# Altium PCB PCB1.PcbDoc (part 5 of 12)
Units mm, origin at the board's own origin, x right, y up, seen from the top; angles counter-clockwise.
Board outline 122.17 x 121.67 mm, 2 copper layers (Top Layer, Bottom Layer); 274 components, 225 nets, 941 pads, 421 vias.
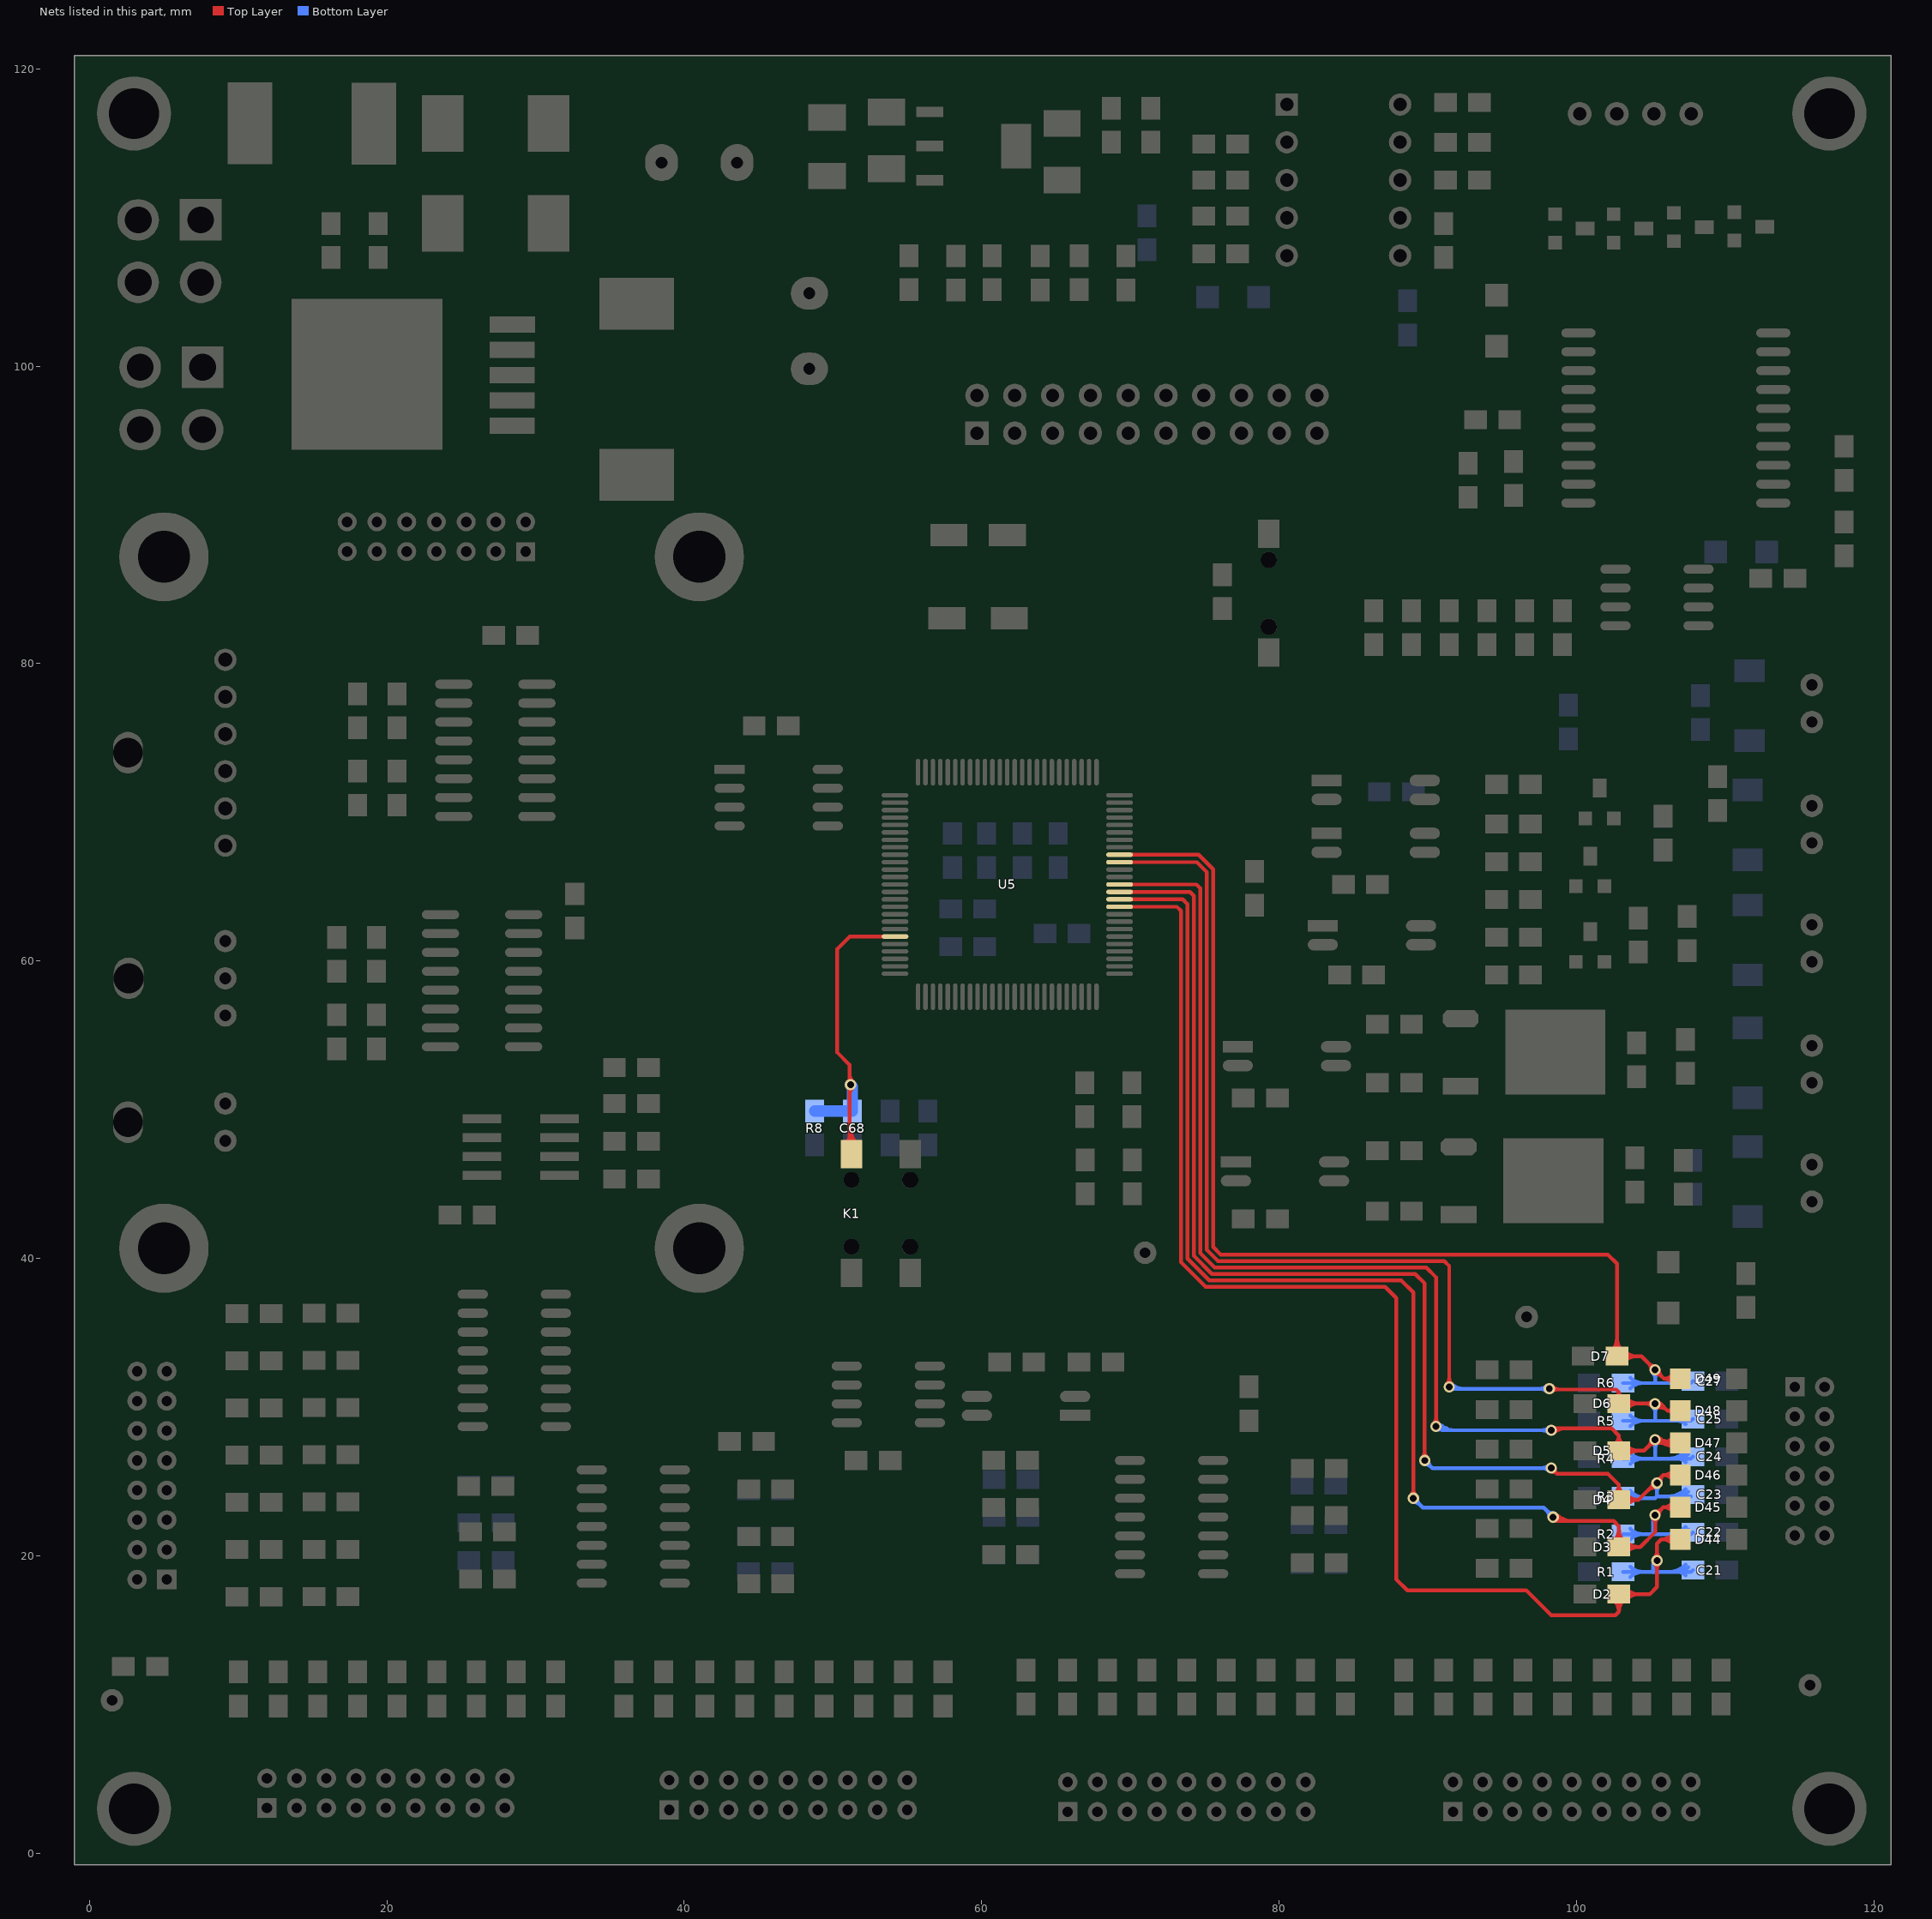
[diagram p5: the nets of this part, all layers, seen from the top]

## Via types
v1: diameter 0.762, hole 0.457, Top Layer to Bottom Layer, 339 vias
v2: diameter 1.27, hole 0.457, Top Layer to Bottom Layer, 39 vias
v3: diameter 0.889, hole 0.457, Top Layer to Bottom Layer, 21 vias
v4: diameter 1.27, hole 0.711, Top Layer to Bottom Layer, 12 vias
v5: diameter 1.524, hole 0.711, Top Layer to Bottom Layer, 5 vias
v6: diameter 1.016, hole 0.457, Top Layer to Bottom Layer, 3 vias
v7: diameter 0.711, hole 0.457, Top Layer to Bottom Layer, 1 vias
v8: diameter 1.524, hole 0.457, Top Layer to Bottom Layer, 1 vias

## Nets (pads, with @x,y where several pads share a name; then routed paths per layer and width w, separated by ;. In a path a pad name is that pad's centre, name@x,y a point inside that pad or via, vN(x,y) a via of type N, cw(c..) or ccw(c..) an arc to the next point about the centre after c; other vN are vias at no path point) (continued)
IN1: C21.2 D2.2 D44.A R1.2 U5.85 | length 150.8
  Top Layer w0.254: U5.85@69.272,63.651 73.128,63.651 73.406,63.373 73.406,39.751 75.057,38.1 87.122,38.1 87.884,37.338 87.884,18.415 88.621,17.678 96.622,17.678 98.298,16.002 102.616,16.002 102.846,16.232 ; D44.A@106.974,21.117 105.699,21.117 ; D2.2@102.495,17.055 cw(c101.707,16.232) 102.846,16.232 ; D2.2@102.495,17.055 cw(c101.707,16.232) 102.846,16.232 ; D2.2@102.495,17.055 cw(c101.707,16.232) 102.846,16.232 ; D2.2@102.495,17.055 cw(c101.707,16.232) 102.846,16.232 ; 102.846,16.232 cw(c103.986,16.232) D2.2@103.198,17.055 ; 102.846,16.232 cw(c103.986,16.232) D2.2@103.198,17.055 ; 102.846,16.232 cw(c103.986,16.232) D2.2@103.198,17.055 ; 102.846,16.232 cw(c103.986,16.232) D2.2@103.198,17.055 ; 102.846,16.232 D2.2@102.846,17.422 104.925,17.422 105.41,17.907 v1(105.41,19.685) 105.41,20.828 105.699,21.117 ; D2.2@103.333,17.063 cw(c104.2,16.196) 104.2,17.422 ; D2.2@103.333,17.063 cw(c104.2,16.196) 104.2,17.422 ; D2.2@103.333,17.063 cw(c104.2,16.196) 104.2,17.422 ; D2.2@103.333,17.063 cw(c104.2,16.196) 104.2,17.422 ; D2.2@103.333,17.781 ccw(c104.2,18.649) 104.2,17.422 ; D2.2@103.333,17.781 ccw(c104.2,18.649) 104.2,17.422 ; D2.2@103.333,17.781 ccw(c104.2,18.649) 104.2,17.422 ; D2.2@103.333,17.781 ccw(c104.2,18.649) 104.2,17.422 ; v1@105.23,19.505 cw(c104.797,19.072) 105.41,19.072 ; v1@105.23,19.505 cw(c104.797,19.072) 105.41,19.072 ; v1@105.23,19.505 cw(c104.797,19.072) 105.41,19.072 ; v1@105.23,19.505 cw(c104.797,19.072) 105.41,19.072 ; v1@105.23,19.865 ccw(c104.797,20.298) 105.41,20.298 ; v1@105.23,19.865 ccw(c104.797,20.298) 105.41,20.298 ; v1@105.23,19.865 ccw(c104.797,20.298) 105.41,20.298 ; v1@105.23,19.865 ccw(c104.797,20.298) 105.41,20.298 ; 105.41,19.072 cw(c106.023,19.072) v1@105.59,19.505 ; 105.41,19.072 cw(c106.023,19.072) v1@105.59,19.505 ; 105.41,19.072 cw(c106.023,19.072) v1@105.59,19.505 ; 105.41,19.072 cw(c106.023,19.072) v1@105.59,19.505 ; 105.41,20.298 ccw(c106.023,20.298) v1@105.59,19.865 ; 105.41,20.298 ccw(c106.023,20.298) v1@105.59,19.865 ; 105.41,20.298 ccw(c106.023,20.298) v1@105.59,19.865 ; 105.41,20.298 ccw(c106.023,20.298) v1@105.59,19.865 ; 105.699,21.117 cw(c105.699,19.984) D44.A@106.546,20.737 ; 105.699,21.117 ccw(c105.699,22.25) D44.A@106.546,21.498 ; 105.699,21.117 cw(c105.699,19.984) D44.A@106.546,20.737 ; 105.699,21.117 ccw(c105.699,22.25) D44.A@106.546,21.498 ; 105.699,21.117 cw(c105.699,19.984) D44.A@106.546,20.737 ; 105.699,21.117 ccw(c105.699,22.25) D44.A@106.546,21.498 ; 105.699,21.117 cw(c105.699,19.984) D44.A@106.546,20.737 ; 105.699,21.117 ccw(c105.699,22.25) D44.A@106.546,21.498 ; 106.264,21.117 cw(c106.264,20.486) D44.A@106.736,20.905 ; 106.264,21.117 ccw(c106.264,21.748) D44.A@106.736,21.329 ; 106.264,21.117 cw(c106.264,20.486) D44.A@106.736,20.905 ; 106.264,21.117 ccw(c106.264,21.748) D44.A@106.736,21.329 ; 106.264,21.117 cw(c106.264,20.486) D44.A@106.736,20.905 ; 106.264,21.117 ccw(c106.264,21.748) D44.A@106.736,21.329 ; 106.264,21.117 cw(c106.264,20.486) D44.A@106.736,20.905 ; 106.264,21.117 ccw(c106.264,21.748) D44.A@106.736,21.329
  Bottom Layer w0.254: R1.2@103.124,18.923 105.156,18.923 ; C21.2@107.823,19.05 107.696,18.923 105.156,18.923 ; R1.2@103.61,18.564 cw(c104.477,17.697) 104.477,18.923 ; R1.2@103.61,18.564 cw(c104.477,17.697) 104.477,18.923 ; R1.2@103.61,18.564 cw(c104.477,17.697) 104.477,18.923 ; R1.2@103.61,18.564 cw(c104.477,17.697) 104.477,18.923 ; R1.2@103.61,19.282 ccw(c104.477,20.149) 104.477,18.923 ; R1.2@103.61,19.282 ccw(c104.477,20.149) 104.477,18.923 ; R1.2@103.61,19.282 ccw(c104.477,20.149) 104.477,18.923 ; R1.2@103.61,19.282 ccw(c104.477,20.149) 104.477,18.923 ; 105.156,18.882 cw(c105.791,18.882) v1@105.519,19.456 ; 105.156,18.882 cw(c105.791,18.882) v1@105.519,19.456 ; 105.156,18.882 cw(c105.791,18.882) v1@105.519,19.456 ; 105.156,18.882 cw(c105.791,18.882) v1@105.519,19.456 ; 105.156,18.923 105.156,19.431 v1(105.41,19.685) ; 105.156,19.283 cw(c105.6,19.283) v1(105.41,19.685) ; 105.156,19.283 cw(c105.6,19.283) v1(105.41,19.685) ; 105.156,19.283 cw(c105.6,19.283) v1(105.41,19.685) ; 105.156,19.283 cw(c105.6,19.283) v1(105.41,19.685) ; 106.163,18.923 ccw(c106.163,20.583) C21.2@107.337,19.409 ; 106.163,18.923 ccw(c106.163,20.583) C21.2@107.337,19.409 ; 106.163,18.923 ccw(c106.163,20.583) C21.2@107.337,19.409 ; 106.163,18.923 ccw(c106.163,20.583) C21.2@107.337,19.409 ; 106.776,18.923 cw(c106.776,18.13) C21.2@107.337,18.691 ; 106.776,18.923 ccw(c106.776,19.97) C21.2@107.516,19.23 ; 106.776,18.923 cw(c106.776,18.13) C21.2@107.337,18.691 ; 106.776,18.923 ccw(c106.776,19.97) C21.2@107.516,19.23 ; 106.776,18.923 cw(c106.776,18.13) C21.2@107.337,18.691 ; 106.776,18.923 ccw(c106.776,19.97) C21.2@107.516,19.23 ; 106.776,18.923 cw(c106.776,18.13) C21.2@107.337,18.691 ; 106.776,18.923 ccw(c106.776,19.97) C21.2@107.516,19.23
IN2: C22.2 D3.2 D45.A R2.2 U5.86 | length 172.4
  Top Layer w0.254: U5.86@69.272,64.151 73.517,64.151 73.838,63.83 73.838,40.003 75.309,38.532 88.214,38.532 89.027,37.719 v1(89.027,23.876) ; D45.A@106.974,23.276 105.826,23.276 ; v1@88.847,24.056 ccw(c88.414,24.489) 89.027,24.489 ; v1@88.847,24.056 ccw(c88.414,24.489) 89.027,24.489 ; v1@88.847,24.056 ccw(c88.414,24.489) 89.027,24.489 ; v1@88.847,24.056 ccw(c88.414,24.489) 89.027,24.489 ; 89.027,24.489 ccw(c89.64,24.489) v1@89.207,24.056 ; 89.027,24.489 ccw(c89.64,24.489) v1@89.207,24.056 ; 89.027,24.489 ccw(c89.64,24.489) v1@89.207,24.056 ; 89.027,24.489 ccw(c89.64,24.489) v1@89.207,24.056 ; v1(98.425,22.606) ccw(c99.038,23.219) 99.038,22.352 ; v1(98.425,22.606) cw(c98.663,22.34) 98.841,22.649 ; v1(98.425,22.606) cw(c98.663,22.34) 98.841,22.649 ; v1(98.425,22.606) cw(c98.663,22.34) 98.841,22.649 ; v1(98.425,22.606) ccw(c99.038,23.219) 99.038,22.352 ; v1(98.425,22.606) cw(c98.663,22.34) 98.841,22.649 ; v1(98.425,22.606) cw(c98.663,22.34) 98.841,22.649 ; v1(98.425,22.606) ccw(c99.038,23.219) 99.038,22.352 ; v1(98.425,22.606) cw(c98.663,22.34) 98.841,22.649 ; v1(98.425,22.606) ccw(c99.038,23.219) 99.038,22.352 ; v1(98.425,22.606) 98.679,22.352 102.489,22.352 102.846,21.995 D3.2@102.846,20.597 104.29,20.597 105.283,21.59 v1(105.283,22.733) ; v1@98.548,22.384 cw(c98.679,22.148) 98.814,22.382 ; v1@98.548,22.384 cw(c98.679,22.148) 98.814,22.382 ; v1@98.548,22.384 cw(c98.679,22.148) 98.814,22.382 ; v1@98.548,22.384 cw(c98.679,22.148) 98.814,22.382 ; v1@98.548,22.384 cw(c98.679,22.148) 98.814,22.382 ; v1@98.548,22.384 cw(c98.679,22.148) 98.814,22.382 ; v1@98.594,22.417 cw(c98.909,22.064) 99.146,22.473 ; v1@98.594,22.417 cw(c98.909,22.064) 99.146,22.473 ; v1@98.594,22.417 cw(c98.909,22.064) 99.146,22.473 ; v1@98.594,22.417 cw(c98.909,22.064) 99.146,22.473 ; v1@98.594,22.417 cw(c98.909,22.064) 99.146,22.473 ; v1@98.594,22.417 cw(c98.909,22.064) 99.146,22.473 ; v1@98.605,22.786 ccw(c99.651,23.832) 99.651,22.352 ; v1@98.605,22.786 ccw(c99.651,23.832) 99.651,22.352 ; v1@98.605,22.786 ccw(c99.651,23.832) 99.651,22.352 ; v1@98.605,22.786 ccw(c99.651,23.832) 99.651,22.352 ; v1@98.679,22.61 ccw(c98.949,22.615) 98.814,22.382 ; v1@98.679,22.61 ccw(c98.949,22.615) 98.814,22.382 ; v1@98.679,22.61 ccw(c98.949,22.615) 98.814,22.382 ; v1@98.679,22.61 ccw(c98.949,22.615) 98.814,22.382 ; v1@98.679,22.61 ccw(c98.949,22.615) 98.814,22.382 ; v1@98.679,22.61 ccw(c98.949,22.615) 98.814,22.382 ; D3.2@102.487,20.956 ccw(c101.62,21.824) 102.846,21.824 ; D3.2@102.487,20.956 ccw(c101.62,21.824) 102.846,21.824 ; D3.2@102.487,20.956 ccw(c101.62,21.824) 102.846,21.824 ; D3.2@102.487,20.956 ccw(c101.62,21.824) 102.846,21.824 ; 102.846,21.824 ccw(c104.073,21.824) D3.2@103.206,20.956 ; 102.846,21.824 ccw(c104.073,21.824) D3.2@103.206,20.956 ; 102.846,21.824 ccw(c104.073,21.824) D3.2@103.206,20.956 ; 102.846,21.824 ccw(c104.073,21.824) D3.2@103.206,20.956 ; D3.2@103.333,20.238 cw(c104.2,19.371) 104.2,20.597 ; D3.2@103.333,20.238 cw(c104.2,19.371) 104.2,20.597 ; D3.2@103.333,20.238 cw(c104.2,19.371) 104.2,20.597 ; D3.2@103.333,20.238 cw(c104.2,19.371) 104.2,20.597 ; D3.2@103.333,20.956 ccw(c104.2,21.824) 104.2,20.597 ; D3.2@103.333,20.956 ccw(c104.2,21.824) 104.2,20.597 ; D3.2@103.333,20.956 ccw(c104.2,21.824) 104.2,20.597 ; D3.2@103.333,20.956 ccw(c104.2,21.824) 104.2,20.597 ; v1@105.103,22.553 cw(c104.67,22.12) 105.283,22.12 ; v1@105.103,22.553 cw(c104.67,22.12) 105.283,22.12 ; v1@105.103,22.553 cw(c104.67,22.12) 105.283,22.12 ; v1@105.103,22.553 cw(c104.67,22.12) 105.283,22.12 ; 105.283,22.12 cw(c105.896,22.12) v1@105.463,22.553 ; 105.283,22.12 cw(c105.896,22.12) v1@105.463,22.553 ; 105.283,22.12 cw(c105.896,22.12) v1@105.463,22.553 ; 105.283,22.12 cw(c105.896,22.12) v1@105.463,22.553 ; v1(105.283,22.733) ccw(c105.194,23.168) 105.623,23.053 ; v1(105.283,22.733) ccw(c105.194,23.168) 105.623,23.053 ; v1(105.283,22.733) ccw(c105.194,23.168) 105.623,23.053 ; v1(105.283,22.733) cw(c105.718,22.644) 105.603,23.073 ; v1(105.283,22.733) cw(c105.718,22.644) 105.603,23.073 ; v1(105.283,22.733) cw(c105.718,22.644) 105.603,23.073 ; v1(105.283,22.733) ccw(c105.194,23.168) 105.623,23.053 ; v1(105.283,22.733) ccw(c105.194,23.168) 105.623,23.053 ; v1(105.283,22.733) cw(c105.718,22.644) 105.603,23.073 ; v1(105.283,22.733) cw(c105.718,22.644) 105.603,23.073 ; v1(105.283,22.733) ccw(c105.194,23.168) 105.623,23.053 ; v1(105.283,22.733) cw(c105.718,22.644) 105.603,23.073 ; v1(105.283,22.733) 105.826,23.276 ; v1@105.283,22.987 ccw(c105.283,23.6) 105.717,23.167 ; v1@105.283,22.987 ccw(c105.283,23.6) 105.717,23.167 ; v1@105.283,22.987 ccw(c105.283,23.6) 105.717,23.167 ; v1@105.283,22.987 ccw(c105.283,23.6) 105.717,23.167 ; v1@105.537,22.733 cw(c106.15,22.733) 105.717,23.167 ; v1@105.537,22.733 cw(c106.15,22.733) 105.717,23.167 ; v1@105.537,22.733 cw(c106.15,22.733) 105.717,23.167 ; v1@105.537,22.733 cw(c106.15,22.733) 105.717,23.167 ; 105.826,23.276 cw(c105.826,22.412) D45.A@106.517,22.932 ; 105.826,23.276 ccw(c105.826,24.14) D45.A@106.517,23.621 ; 105.826,23.276 cw(c105.826,22.412) D45.A@106.517,22.932 ; 105.826,23.276 ccw(c105.826,24.14) D45.A@106.517,23.621 ; 105.826,23.276 cw(c105.826,22.412) D45.A@106.517,22.932 ; 105.826,23.276 ccw(c105.826,24.14) D45.A@106.517,23.621 ; 105.826,23.276 cw(c105.826,22.412) D45.A@106.517,22.932 ; 105.826,23.276 ccw(c105.826,24.14) D45.A@106.517,23.621
  Bottom Layer w0.254: v1(89.027,23.876) 89.662,23.241 97.79,23.241 v1(98.425,22.606) ; R2.2@103.124,21.463 105.156,21.463 ; v1(105.283,22.733) 105.156,22.606 105.156,21.463 ; C22.2@107.823,21.59 107.696,21.463 105.156,21.463 ; v1@89.027,23.622 cw(c89.027,23.009) 89.461,23.442 ; v1@89.027,23.622 cw(c89.027,23.009) 89.461,23.442 ; v1@89.027,23.622 cw(c89.027,23.009) 89.461,23.442 ; v1@89.027,23.622 cw(c89.027,23.009) 89.461,23.442 ; v1@89.281,23.876 ccw(c89.894,23.876) 89.461,23.442 ; v1@89.281,23.876 ccw(c89.894,23.876) 89.461,23.442 ; v1@89.281,23.876 ccw(c89.894,23.876) 89.461,23.442 ; v1@89.281,23.876 ccw(c89.894,23.876) 89.461,23.442 ; 97.991,23.04 cw(c97.558,22.606) v1@98.171,22.606 ; 97.991,23.04 ccw(c98.425,23.473) v1@98.425,22.86 ; 97.991,23.04 cw(c97.558,22.606) v1@98.171,22.606 ; 97.991,23.04 ccw(c98.425,23.473) v1@98.425,22.86 ; 97.991,23.04 cw(c97.558,22.606) v1@98.171,22.606 ; 97.991,23.04 ccw(c98.425,23.473) v1@98.425,22.86 ; 97.991,23.04 cw(c97.558,22.606) v1@98.171,22.606 ; 97.991,23.04 ccw(c98.425,23.473) v1@98.425,22.86 ; R2.2@103.61,21.104 cw(c104.477,20.237) 104.477,21.463 ; R2.2@103.61,21.104 cw(c104.477,20.237) 104.477,21.463 ; R2.2@103.61,21.104 cw(c104.477,20.237) 104.477,21.463 ; R2.2@103.61,21.104 cw(c104.477,20.237) 104.477,21.463 ; R2.2@103.61,21.822 ccw(c104.477,22.689) 104.477,21.463 ; R2.2@103.61,21.822 ccw(c104.477,22.689) 104.477,21.463 ; R2.2@103.61,21.822 ccw(c104.477,22.689) 104.477,21.463 ; R2.2@103.61,21.822 ccw(c104.477,22.689) 104.477,21.463 ; 105.156,21.813 cw(c106.203,21.813) v1@105.463,22.553 ; 105.156,21.813 cw(c106.203,21.813) v1@105.463,22.553 ; 105.156,21.813 cw(c106.203,21.813) v1@105.463,22.553 ; 105.156,21.813 cw(c106.203,21.813) v1@105.463,22.553 ; 106.163,21.463 ccw(c106.163,23.123) C22.2@107.337,21.949 ; 106.163,21.463 ccw(c106.163,23.123) C22.2@107.337,21.949 ; 106.163,21.463 ccw(c106.163,23.123) C22.2@107.337,21.949 ; 106.163,21.463 ccw(c106.163,23.123) C22.2@107.337,21.949 ; 106.776,21.463 cw(c106.776,20.67) C22.2@107.337,21.231 ; 106.776,21.463 ccw(c106.776,22.51) C22.2@107.516,21.77 ; 106.776,21.463 cw(c106.776,20.67) C22.2@107.337,21.231 ; 106.776,21.463 ccw(c106.776,22.51) C22.2@107.516,21.77 ; 106.776,21.463 cw(c106.776,20.67) C22.2@107.337,21.231 ; 106.776,21.463 ccw(c106.776,22.51) C22.2@107.516,21.77 ; 106.776,21.463 cw(c106.776,20.67) C22.2@107.337,21.231 ; 106.776,21.463 ccw(c106.776,22.51) C22.2@107.516,21.77
IN3: C23.2 D4.2 D46.A R3.2 U5.87 | length 153.3
  Top Layer w0.254: U5.87@69.272,64.651 74.008,64.651 74.27,64.389 74.27,40.182 75.488,38.964 89.154,38.964 89.789,38.329 v1(89.789,26.416) ; v1(98.298,25.908) 98.298,25.781 98.425,25.781 98.679,25.527 ; D46.A@106.974,25.435 105.826,25.435 ; v1@89.609,26.596 ccw(c89.176,27.029) 89.789,27.029 ; v1@89.609,26.596 ccw(c89.176,27.029) 89.789,27.029 ; v1@89.609,26.596 ccw(c89.176,27.029) 89.789,27.029 ; v1@89.609,26.596 ccw(c89.176,27.029) 89.789,27.029 ; 89.789,27.029 ccw(c90.402,27.029) v1@89.969,26.596 ; 89.789,27.029 ccw(c90.402,27.029) v1@89.969,26.596 ; 89.789,27.029 ccw(c90.402,27.029) v1@89.969,26.596 ; 89.789,27.029 ccw(c90.402,27.029) v1@89.969,26.596 ; v1@98.322,25.655 cw(c98.365,25.213) 98.679,25.527 ; v1@98.322,25.655 cw(c98.365,25.213) 98.679,25.527 ; v1@98.322,25.655 cw(c98.365,25.213) 98.679,25.527 ; v1@98.322,25.655 cw(c98.365,25.213) 98.679,25.527 ; v1@98.551,25.884 ccw(c98.993,25.841) 98.679,25.527 ; v1@98.551,25.884 ccw(c98.993,25.841) 98.679,25.527 ; v1@98.551,25.884 ccw(c98.993,25.841) 98.679,25.527 ; v1@98.551,25.884 ccw(c98.993,25.841) 98.679,25.527 ; 98.679,25.527 102.108,25.527 102.846,24.789 ; D4.2@102.541,24.179 ccw(c102.084,24.789) 102.846,24.789 ; D4.2@102.541,24.179 ccw(c102.084,24.789) 102.846,24.789 ; D4.2@102.541,24.179 ccw(c102.084,24.789) 102.846,24.789 ; D4.2@102.541,24.179 ccw(c102.084,24.789) 102.846,24.789 ; 102.846,24.789 ccw(c103.609,24.789) D4.2@103.151,24.179 ; 102.846,24.789 ccw(c103.609,24.789) D4.2@103.151,24.179 ; 102.846,24.789 ccw(c103.609,24.789) D4.2@103.151,24.179 ; 102.846,24.789 ccw(c103.609,24.789) D4.2@103.151,24.179 ; 102.846,24.789 D4.2@102.846,23.772 104.163,23.772 ; D4.2@103.34,23.421 cw(c104.163,22.633) 104.163,23.772 ; D4.2@103.34,23.421 cw(c104.163,22.633) 104.163,23.772 ; D4.2@103.34,23.421 cw(c104.163,22.633) 104.163,23.772 ; D4.2@103.34,23.421 cw(c104.163,22.633) 104.163,23.772 ; D4.2@103.34,24.124 ccw(c104.163,24.911) 104.163,23.772 ; D4.2@103.34,24.124 ccw(c104.163,24.911) 104.163,23.772 ; D4.2@103.34,24.124 ccw(c104.163,24.911) 104.163,23.772 ; D4.2@103.34,24.124 ccw(c104.163,24.911) 104.163,23.772 ; 104.163,23.772 105.826,25.435 ; 104.76,24.369 cw(c105.41,23.718) v1@105.41,24.638 ; 104.76,24.369 cw(c105.41,23.718) v1@105.41,24.638 ; 104.76,24.369 cw(c105.41,23.718) v1@105.41,24.638 ; 104.76,24.369 cw(c105.41,23.718) v1@105.41,24.638 ; 105.015,24.532 ccw(c104.864,25.095) v1(105.41,24.892) ; 105.015,24.532 ccw(c104.864,25.095) v1(105.41,24.892) ; 105.015,24.532 ccw(c104.864,25.095) v1(105.41,24.892) ; 105.015,24.532 ccw(c104.864,25.095) v1(105.41,24.892) ; 105.015,24.532 ccw(c104.864,25.095) v1(105.41,24.892) ; 105.015,24.532 ccw(c104.864,25.095) v1(105.41,24.892) ; 105.066,24.675 ccw(c104.849,24.892) v1@105.156,24.892 ; 105.066,24.675 ccw(c104.849,24.892) v1@105.156,24.892 ; 105.066,24.675 ccw(c104.849,24.892) v1@105.156,24.892 ; 105.066,24.675 ccw(c104.849,24.892) v1@105.156,24.892 ; v1@105.41,25.146 ccw(c105.41,25.453) 105.627,25.236 ; v1@105.41,25.146 ccw(c105.41,25.453) 105.627,25.236 ; v1@105.41,25.146 ccw(c105.41,25.453) 105.627,25.236 ; v1@105.41,25.146 ccw(c105.41,25.453) 105.627,25.236 ; v1@105.661,24.931 cw(c106.241,25.02) 105.826,25.435 ; v1@105.661,24.931 cw(c106.241,25.02) 105.826,25.435 ; v1@105.661,24.931 cw(c106.241,25.02) 105.826,25.435 ; v1@105.661,24.931 cw(c106.241,25.02) 105.826,25.435 ; 105.826,25.435 cw(c105.826,24.571) D46.A@106.517,25.091 ; 105.826,25.435 ccw(c105.826,26.299) D46.A@106.517,25.78 ; 105.826,25.435 cw(c105.826,24.571) D46.A@106.517,25.091 ; 105.826,25.435 ccw(c105.826,26.299) D46.A@106.517,25.78 ; 105.826,25.435 cw(c105.826,24.571) D46.A@106.517,25.091 ; 105.826,25.435 ccw(c105.826,26.299) D46.A@106.517,25.78 ; 105.826,25.435 cw(c105.826,24.571) D46.A@106.517,25.091 ; 105.826,25.435 ccw(c105.826,26.299) D46.A@106.517,25.78
  Bottom Layer w0.254: v1(89.789,26.416) 90.297,25.908 v1(98.298,25.908) ; R3.2@103.124,24.003 103.632,24.003 103.505,23.876 105.283,23.876 105.41,24.003 ; v1(105.41,24.892) 105.41,24.003 ; C23.2@107.696,24.003 105.41,24.003 ; v1@89.789,26.162 cw(c89.789,25.549) 90.223,25.982 ; v1@89.789,26.162 cw(c89.789,25.549) 90.223,25.982 ; v1@89.789,26.162 cw(c89.789,25.549) 90.223,25.982 ; v1@89.789,26.162 cw(c89.789,25.549) 90.223,25.982 ; v1@90.043,26.416 ccw(c90.656,26.416) 90.223,25.982 ; v1@90.043,26.416 ccw(c90.656,26.416) 90.223,25.982 ; v1@90.043,26.416 ccw(c90.656,26.416) 90.223,25.982 ; v1@90.043,26.416 ccw(c90.656,26.416) 90.223,25.982 ; 97.685,25.908 cw(c97.685,25.295) v1@98.118,25.728 ; 97.685,25.908 ccw(c97.685,26.521) v1@98.118,26.088 ; 97.685,25.908 cw(c97.685,25.295) v1@98.118,25.728 ; 97.685,25.908 ccw(c97.685,26.521) v1@98.118,26.088 ; 97.685,25.908 cw(c97.685,25.295) v1@98.118,25.728 ; 97.685,25.908 ccw(c97.685,26.521) v1@98.118,26.088 ; 97.685,25.908 cw(c97.685,25.295) v1@98.118,25.728 ; 97.685,25.908 ccw(c97.685,26.521) v1@98.118,26.088 ; R3.2@103.431,24.183 ccw(c104.171,24.923) 104.171,23.876 ; R3.2@103.431,24.183 ccw(c104.171,24.923) 104.171,23.876 ; R3.2@103.431,24.183 ccw(c104.171,24.923) 104.171,23.876 ; R3.2@103.431,24.183 ccw(c104.171,24.923) 104.171,23.876 ; R3.2@103.61,23.644 cw(c104.171,23.083) 104.171,23.876 ; R3.2@103.61,23.644 cw(c104.171,23.083) 104.171,23.876 ; R3.2@103.61,23.644 cw(c104.171,23.083) 104.171,23.876 ; R3.2@103.61,23.644 cw(c104.171,23.083) 104.171,23.876 ; R3.2@103.61,24.362 ccw(c104.784,25.536) 104.784,23.876 ; R3.2@103.61,24.362 ccw(c104.784,25.536) 104.784,23.876 ; R3.2@103.61,24.362 ccw(c104.784,25.536) 104.784,23.876 ; R3.2@103.61,24.362 ccw(c104.784,25.536) 104.784,23.876 ; v1@105.23,24.712 cw(c104.797,24.279) 105.41,24.279 ; v1@105.23,24.712 cw(c104.797,24.279) 105.41,24.279 ; v1@105.23,24.712 cw(c104.797,24.279) 105.41,24.279 ; v1@105.23,24.712 cw(c104.797,24.279) 105.41,24.279 ; 105.41,24.279 cw(c106.023,24.279) v1@105.59,24.712 ; 105.41,24.279 cw(c106.023,24.279) v1@105.59,24.712 ; 105.41,24.279 cw(c106.023,24.279) v1@105.59,24.712 ; 105.41,24.279 cw(c106.023,24.279) v1@105.59,24.712 ; 106.163,24.003 ccw(c106.163,25.663) C23.2@107.337,24.489 ; 106.163,24.003 ccw(c106.163,25.663) C23.2@107.337,24.489 ; 106.163,24.003 ccw(c106.163,25.663) C23.2@107.337,24.489 ; 106.163,24.003 ccw(c106.163,25.663) C23.2@107.337,24.489 ; 106.776,24.003 cw(c106.776,23.21) C23.2@107.337,23.771 ; 106.776,24.003 ccw(c106.776,25.05) C23.2@107.516,24.31 ; 106.776,24.003 cw(c106.776,23.21) C23.2@107.337,23.771 ; 106.776,24.003 ccw(c106.776,25.05) C23.2@107.516,24.31 ; 106.776,24.003 cw(c106.776,23.21) C23.2@107.337,23.771 ; 106.776,24.003 ccw(c106.776,25.05) C23.2@107.516,24.31 ; 106.776,24.003 cw(c106.776,23.21) C23.2@107.337,23.771 ; 106.776,24.003 ccw(c106.776,25.05) C23.2@107.516,24.31
IN4: C24.2 D5.2 D47.A R4.2 U5.88 | length 207.5
  Top Layer w0.254: U5.88@69.272,65.151 74.447,65.151 74.701,64.897 74.701,40.361 75.667,39.395 89.891,39.395 90.551,38.735 v1(90.551,28.702) ; v1(98.298,28.448) 98.425,28.575 102.362,28.575 102.846,28.091 ; D47.A@106.974,27.594 105.064,27.594 104.544,27.074 D5.2@102.846,27.074 102.846,28.091 ; v1@90.371,28.882 ccw(c89.938,29.315) 90.551,29.315 ; v1@90.371,28.882 ccw(c89.938,29.315) 90.551,29.315 ; v1@90.371,28.882 ccw(c89.938,29.315) 90.551,29.315 ; v1@90.371,28.882 ccw(c89.938,29.315) 90.551,29.315 ; 90.551,29.315 ccw(c91.164,29.315) v1@90.731,28.882 ; 90.551,29.315 ccw(c91.164,29.315) v1@90.731,28.882 ; 90.551,29.315 ccw(c91.164,29.315) v1@90.731,28.882 ; 90.551,29.315 ccw(c91.164,29.315) v1@90.731,28.882 ; v1@98.478,28.268 cw(c99.218,27.528) 99.218,28.575 ; v1@98.478,28.268 cw(c99.218,27.528) 99.218,28.575 ; v1@98.478,28.268 cw(c99.218,27.528) 99.218,28.575 ; v1@98.478,28.268 cw(c99.218,27.528) 99.218,28.575 ; D5.2@102.541,27.481 ccw(c102.084,28.091) 102.846,28.091 ; D5.2@102.541,27.481 ccw(c102.084,28.091) 102.846,28.091 ; D5.2@102.541,27.481 ccw(c102.084,28.091) 102.846,28.091 ; D5.2@102.541,27.481 ccw(c102.084,28.091) 102.846,28.091 ; 102.846,28.091 ccw(c103.609,28.091) D5.2@103.151,27.481 ; 102.846,28.091 ccw(c103.609,28.091) D5.2@103.151,27.481 ; 102.846,28.091 ccw(c103.609,28.091) D5.2@103.151,27.481 ; 102.846,28.091 ccw(c103.609,28.091) D5.2@103.151,27.481 ; D5.2@103.333,26.715 cw(c104.2,25.848) 104.2,27.074 ; D5.2@103.333,26.715 cw(c104.2,25.848) 104.2,27.074 ; D5.2@103.333,26.715 cw(c104.2,25.848) 104.2,27.074 ; D5.2@103.333,26.715 cw(c104.2,25.848) 104.2,27.074 ; D5.2@103.333,27.433 ccw(c104.2,28.301) 104.2,27.074 ; D5.2@103.333,27.433 ccw(c104.2,28.301) 104.2,27.074 ; D5.2@103.333,27.433 ccw(c104.2,28.301) 104.2,27.074 ; D5.2@103.333,27.433 ccw(c104.2,28.301) 104.2,27.074 ; 104.849,27.379 cw(c105.283,26.946) v1@105.283,27.559 ; 104.849,27.379 ccw(c104.416,27.813) v1@105.029,27.813 ; 104.849,27.379 cw(c105.283,26.946) v1@105.283,27.559 ; 104.849,27.379 ccw(c104.416,27.813) v1@105.029,27.813 ; 104.849,27.379 cw(c105.283,26.946) v1@105.283,27.559 ; 104.849,27.379 ccw(c104.416,27.813) v1@105.029,27.813 ; 104.849,27.379 cw(c105.283,26.946) v1@105.283,27.559 ; 104.849,27.379 ccw(c104.416,27.813) v1@105.029,27.813 ; 104.943,27.493 cw(c105.372,27.378) v1(105.283,27.813) ; 104.943,27.493 cw(c105.372,27.378) v1(105.283,27.813) ; 104.943,27.493 cw(c105.372,27.378) v1(105.283,27.813) ; 104.943,27.493 cw(c105.372,27.378) v1(105.283,27.813) ; 104.943,27.493 cw(c105.372,27.378) v1(105.283,27.813) ; 104.943,27.493 cw(c105.372,27.378) v1(105.283,27.813) ; 104.963,27.473 ccw(c104.848,27.902) v1(105.283,27.813) ; 104.963,27.473 ccw(c104.848,27.902) v1(105.283,27.813) ; 104.963,27.473 ccw(c104.848,27.902) v1(105.283,27.813) ; 104.963,27.473 ccw(c104.848,27.902) v1(105.283,27.813) ; 104.963,27.473 ccw(c104.848,27.902) v1(105.283,27.813) ; 104.963,27.473 ccw(c104.848,27.902) v1(105.283,27.813) ; v1(105.283,27.813) ccw(c105.812,28.342) 105.812,27.594 ; v1(105.283,27.813) cw(c105.515,27.597) 105.673,27.871 ; v1(105.283,27.813) cw(c105.452,27.554) 105.67,27.772 ; v1(105.283,27.813) cw(c105.452,27.554) 105.67,27.772 ; v1(105.283,27.813) cw(c105.452,27.554) 105.67,27.772 ; v1(105.283,27.813) cw(c105.515,27.597) 105.673,27.871 ; v1(105.283,27.813) cw(c105.452,27.554) 105.67,27.772 ; v1(105.283,27.813) cw(c105.452,27.554) 105.67,27.772 ; v1(105.283,27.813) cw(c105.515,27.597) 105.673,27.871 ; v1(105.283,27.813) cw(c105.452,27.554) 105.67,27.772 ; v1(105.283,27.813) ccw(c105.812,28.342) 105.812,27.594 ; v1(105.283,27.813) cw(c105.515,27.597) 105.673,27.871 ; v1(105.283,27.813) cw(c105.452,27.554) 105.67,27.772 ; v1(105.283,27.813) cw(c105.452,27.554) 105.67,27.772 ; v1(105.283,27.813) cw(c105.515,27.597) 105.673,27.871 ; v1(105.283,27.813) cw(c105.452,27.554) 105.67,27.772 ; v1(105.283,27.813) ccw(c105.812,28.342) 105.812,27.594 ; v1(105.283,27.813) cw(c105.515,27.597) 105.673,27.871 ; v1(105.283,27.813) cw(c105.452,27.554) 105.67,27.772 ; v1(105.283,27.813) ccw(c105.812,28.342) 105.812,27.594 ; v1@105.422,27.6 cw(c105.626,27.285) 105.892,27.551 ; v1@105.422,27.6 cw(c105.626,27.285) 105.892,27.551 ; v1@105.422,27.6 cw(c105.626,27.285) 105.892,27.551 ; v1@105.422,27.6 cw(c105.626,27.285) 105.892,27.551 ; v1@105.422,27.6 cw(c105.626,27.285) 105.892,27.551 ; v1@105.422,27.6 cw(c105.626,27.285) 105.892,27.551 ; v1@105.422,27.6 cw(c105.626,27.285) 105.892,27.551 ; v1@105.422,27.6 cw(c105.626,27.285) 105.892,27.551 ; v1@105.422,27.6 cw(c105.626,27.285) 105.892,27.551 ; v1@105.422,27.6 cw(c105.626,27.285) 105.892,27.551 ; v1@105.434,27.609 cw(c105.534,27.474) 105.618,27.62 ; v1@105.434,27.609 cw(c105.534,27.474) 105.618,27.62 ; v1@105.434,27.609 cw(c105.534,27.474) 105.618,27.62 ; v1@105.434,27.609 cw(c105.534,27.474) 105.618,27.62 ; v1@105.434,27.609 cw(c105.534,27.474) 105.618,27.62 ; v1@105.434,27.609 cw(c105.534,27.474) 105.618,27.62 ; v1@105.463,27.993 ccw(c106.425,28.955) D47.A@106.425,27.594 ; v1@105.463,27.993 ccw(c106.425,28.955) D47.A@106.425,27.594 ; v1@105.463,27.993 ccw(c106.425,28.955) D47.A@106.425,27.594 ; v1@105.463,27.993 ccw(c106.425,28.955) D47.A@106.425,27.594 ; v1@105.469,27.64 cw(c105.754,27.373) 105.95,27.711 ; v1@105.469,27.64 cw(c105.754,27.373) 105.95,27.711 ; v1@105.469,27.64 cw(c105.754,27.373) 105.95,27.711 ; v1@105.469,27.64 cw(c105.754,27.373) 105.95,27.711 ; v1@105.469,27.64 cw(c105.754,27.373) 105.95,27.711 ; v1@105.469,27.64 cw(c105.754,27.373) 105.95,27.711 ; v1@105.503,27.94 ccw(c106.423,28.471) 106.148,27.445 ; v1@105.503,27.94 ccw(c106.423,28.471) 106.148,27.445 ; v1@105.503,27.94 ccw(c106.423,28.471) 106.148,27.445 ; v1@105.503,27.94 ccw(c106.423,28.471) 106.148,27.445 ; v1@105.503,27.94 ccw(c106.423,28.471) 106.148,27.445 ; v1@105.503,27.94 ccw(c106.423,28.471) 106.148,27.445 ; v1@105.503,27.94 ccw(c106.423,28.471) 106.148,27.445 ; v1@105.503,27.94 ccw(c106.423,28.471) 106.148,27.445 ; v1@105.503,27.94 ccw(c106.423,28.471) 106.148,27.445 ; v1@105.503,27.94 ccw(c106.423,28.471) 106.148,27.445 ; v1@105.535,27.784 ccw(c105.702,27.765) 105.618,27.62 ; v1@105.535,27.784 ccw(c105.702,27.765) 105.618,27.62 ; v1@105.535,27.784 ccw(c105.702,27.765) 105.618,27.62 ; v1@105.535,27.784 ccw(c105.702,27.765) 105.618,27.62 ; v1@105.535,27.784 ccw(c105.702,27.765) 105.618,27.62 ; v1@105.535,27.784 ccw(c105.702,27.765) 105.618,27.62 ; v1@105.591,27.594 cw(c105.591,26.211) D47.A@106.569,27.189 ; v1@105.591,27.594 ccw(c105.591,28.977) D47.A@106.569,27.999 ; v1@105.591,27.594 cw(c105.591,26.211) D47.A@106.569,27.189 ; v1@105.591,27.594 ccw(c105.591,28.977) D47.A@106.569,27.999 ; v1@105.591,27.594 cw(c105.591,26.211) D47.A@106.569,27.189 ; v1@105.591,27.594 ccw(c105.591,28.977) D47.A@106.569,27.999 ; v1@105.591,27.594 cw(c105.591,26.211) D47.A@106.569,27.189 ; v1@105.591,27.594 ccw(c105.591,28.977) D47.A@106.569,27.999 ; 105.982,27.713 cw(c105.781,26.962) D47.A@106.468,27.326 ; 105.982,27.713 ccw(c106.104,28.165) D47.A@106.495,27.908 ; 105.982,27.713 cw(c105.781,26.962) D47.A@106.468,27.326 ; 105.982,27.713 ccw(c106.104,28.165) D47.A@106.495,27.908 ; 105.982,27.713 cw(c105.781,26.962) D47.A@106.468,27.326 ; 105.982,27.713 ccw(c106.104,28.165) D47.A@106.495,27.908 ; 105.982,27.713 cw(c105.781,26.962) D47.A@106.468,27.326 ; 105.982,27.713 ccw(c106.104,28.165) D47.A@106.495,27.908 ; 105.982,27.713 cw(c105.781,26.962) D47.A@106.468,27.326 ; 105.982,27.713 ccw(c106.104,28.165) D47.A@106.495,27.908 ; 105.982,27.713 cw(c105.781,26.962) D47.A@106.468,27.326 ; 105.982,27.713 ccw(c106.104,28.165) D47.A@106.495,27.908 ; 106.204,27.594 cw(c106.204,26.824) D47.A@106.749,27.369 ; 106.204,27.594 ccw(c106.204,28.364) D47.A@106.749,27.82 ; 106.204,27.594 cw(c106.204,26.824) D47.A@106.749,27.369 ; 106.204,27.594 ccw(c106.204,28.364) D47.A@106.749,27.82 ; 106.204,27.594 cw(c106.204,26.824) D47.A@106.749,27.369 ; 106.204,27.594 ccw(c106.204,28.364) D47.A@106.749,27.82 ; 106.204,27.594 cw(c106.204,26.824) D47.A@106.749,27.369 ; 106.204,27.594 ccw(c106.204,28.364) D47.A@106.749,27.82
  Bottom Layer w0.254: v1(98.298,28.448) 90.932,28.448 90.678,28.702 v1(90.551,28.702) ; R4.2@103.124,26.543 105.283,26.543 ; v1(105.283,27.813) 105.283,26.543 ; C24.2@107.823,26.67 107.696,26.543 105.283,26.543 ; v1(90.551,28.702) ccw(c91.164,29.315) 91.164,28.448 ; v1(90.551,28.702) cw(c90.789,28.436) 90.967,28.745 ; v1(90.551,28.702) cw(c90.789,28.436) 90.967,28.745 ; v1(90.551,28.702) cw(c90.789,28.436) 90.967,28.745 ; v1(90.551,28.702) ccw(c91.164,29.315) 91.164,28.448 ; v1(90.551,28.702) cw(c90.789,28.436) 90.967,28.745 ; v1(90.551,28.702) cw(c90.789,28.436) 90.967,28.745 ; v1(90.551,28.702) ccw(c91.164,29.315) 91.164,28.448 ; v1(90.551,28.702) cw(c90.789,28.436) 90.967,28.745 ; v1(90.551,28.702) ccw(c91.164,29.315) 91.164,28.448 ; v1@90.674,28.48 cw(c90.805,28.244) 90.94,28.478 ; v1@90.674,28.48 cw(c90.805,28.244) 90.94,28.478 ; v1@90.674,28.48 cw(c90.805,28.244) 90.94,28.478 ; v1@90.674,28.48 cw(c90.805,28.244) 90.94,28.478 ; v1@90.674,28.48 cw(c90.805,28.244) 90.94,28.478 ; v1@90.674,28.48 cw(c90.805,28.244) 90.94,28.478 ; v1@90.72,28.513 cw(c91.035,28.16) 91.272,28.569 ; v1@90.72,28.513 cw(c91.035,28.16) 91.272,28.569 ; v1@90.72,28.513 cw(c91.035,28.16) 91.272,28.569 ; v1@90.72,28.513 cw(c91.035,28.16) 91.272,28.569 ; v1@90.72,28.513 cw(c91.035,28.16) 91.272,28.569 ; v1@90.72,28.513 cw(c91.035,28.16) 91.272,28.569 ; v1@90.731,28.882 ccw(c91.777,29.928) 91.777,28.448 ; v1@90.731,28.882 ccw(c91.777,29.928) 91.777,28.448 ; v1@90.731,28.882 ccw(c91.777,29.928) 91.777,28.448 ; v1@90.731,28.882 ccw(c91.777,29.928) 91.777,28.448 ; v1@90.805,28.706 ccw(c91.075,28.711) 90.94,28.478 ; v1@90.805,28.706 ccw(c91.075,28.711) 90.94,28.478 ; v1@90.805,28.706 ccw(c91.075,28.711) 90.94,28.478 ; v1@90.805,28.706 ccw(c91.075,28.711) 90.94,28.478 ; v1@90.805,28.706 ccw(c91.075,28.711) 90.94,28.478 ; v1@90.805,28.706 ccw(c91.075,28.711) 90.94,28.478 ; 97.685,28.448 cw(c97.685,27.835) v1@98.118,28.268 ; 97.685,28.448 ccw(c97.685,29.061) v1@98.118,28.628 ; 97.685,28.448 cw(c97.685,27.835) v1@98.118,28.268 ; 97.685,28.448 ccw(c97.685,29.061) v1@98.118,28.628 ; 97.685,28.448 cw(c97.685,27.835) v1@98.118,28.268 ; 97.685,28.448 ccw(c97.685,29.061) v1@98.118,28.628 ; 97.685,28.448 cw(c97.685,27.835) v1@98.118,28.268 ; 97.685,28.448 ccw(c97.685,29.061) v1@98.118,28.628 ; R4.2@103.61,26.184 cw(c104.477,25.317) 104.477,26.543 ; R4.2@103.61,26.184 cw(c104.477,25.317) 104.477,26.543 ; R4.2@103.61,26.184 cw(c104.477,25.317) 104.477,26.543 ; R4.2@103.61,26.184 cw(c104.477,25.317) 104.477,26.543 ; R4.2@103.61,26.902 ccw(c104.477,27.769) 104.477,26.543 ; R4.2@103.61,26.902 ccw(c104.477,27.769) 104.477,26.543 ; R4.2@103.61,26.902 ccw(c104.477,27.769) 104.477,26.543 ; R4.2@103.61,26.902 ccw(c104.477,27.769) 104.477,26.543 ; v1@105.103,27.633 cw(c104.67,27.2) 105.283,27.2 ; v1@105.103,27.633 cw(c104.67,27.2) 105.283,27.2 ; v1@105.103,27.633 cw(c104.67,27.2) 105.283,27.2 ; v1@105.103,27.633 cw(c104.67,27.2) 105.283,27.2 ; 105.283,27.2 cw(c105.896,27.2) v1@105.463,27.633 ; 105.283,27.2 cw(c105.896,27.2) v1@105.463,27.633 ; 105.283,27.2 cw(c105.896,27.2) v1@105.463,27.633 ; 105.283,27.2 cw(c105.896,27.2) v1@105.463,27.633 ; 106.163,26.543 ccw(c106.163,28.203) C24.2@107.337,27.029 ; 106.163,26.543 ccw(c106.163,28.203) C24.2@107.337,27.029 ; 106.163,26.543 ccw(c106.163,28.203) C24.2@107.337,27.029 ; 106.163,26.543 ccw(c106.163,28.203) C24.2@107.337,27.029 ; 106.776,26.543 cw(c106.776,25.75) C24.2@107.337,26.311 ; 106.776,26.543 ccw(c106.776,27.59) C24.2@107.516,26.85 ; 106.776,26.543 cw(c106.776,25.75) C24.2@107.337,26.311 ; 106.776,26.543 ccw(c106.776,27.59) C24.2@107.516,26.85 ; 106.776,26.543 cw(c106.776,25.75) C24.2@107.337,26.311 ; 106.776,26.543 ccw(c106.776,27.59) C24.2@107.516,26.85 ; 106.776,26.543 cw(c106.776,25.75) C24.2@107.337,26.311 ; 106.776,26.543 ccw(c106.776,27.59) C24.2@107.516,26.85
IN5: C25.2 D6.2 D48.A R5.2 U5.91 | length 145.8
  Top Layer w0.254: U5.91@69.272,66.651 74.47,66.651 75.133,65.988 75.133,40.588 75.894,39.827 91.11,39.827 91.44,39.497 v1(91.44,31.369) ; v1(98.171,31.242) 98.224,31.189 102.669,31.189 102.846,31.012 ; D48.A@106.974,29.753 106.137,29.753 ; v1@91.26,31.549 ccw(c90.827,31.982) 91.44,31.982 ; v1@91.26,31.549 ccw(c90.827,31.982) 91.44,31.982 ; v1@91.26,31.549 ccw(c90.827,31.982) 91.44,31.982 ; v1@91.26,31.549 ccw(c90.827,31.982) 91.44,31.982 ; 91.44,31.982 ccw(c92.053,31.982) v1@91.62,31.549 ; 91.44,31.982 ccw(c92.053,31.982) v1@91.62,31.549 ; 91.44,31.982 ccw(c92.053,31.982) v1@91.62,31.549 ; 91.44,31.982 ccw(c92.053,31.982) v1@91.62,31.549 ; v1@98.351,31.062 cw(c98.656,30.757) 98.656,31.189 ; v1@98.351,31.062 cw(c98.656,30.757) 98.656,31.189 ; v1@98.351,31.062 cw(c98.656,30.757) 98.656,31.189 ; v1@98.351,31.062 cw(c98.656,30.757) 98.656,31.189 ; v1@98.351,31.422 ccw(c98.912,31.983) 98.912,31.189 ; v1@98.351,31.422 ccw(c98.912,31.983) 98.912,31.189 ; v1@98.351,31.422 ccw(c98.912,31.983) 98.912,31.189 ; v1@98.351,31.422 ccw(c98.912,31.983) 98.912,31.189 ; D6.2@102.651,30.718 ccw(c102.528,31.012) 102.846,31.012 ; D6.2@102.651,30.718 ccw(c102.528,31.012) 102.846,31.012 ; D6.2@102.651,30.718 ccw(c102.528,31.012) 102.846,31.012 ; D6.2@102.651,30.718 ccw(c102.528,31.012) 102.846,31.012 ; 102.846,31.012 ccw(c103.164,31.012) D6.2@103.042,30.718 ; 102.846,31.012 ccw(c103.164,31.012) D6.2@103.042,30.718 ; 102.846,31.012 ccw(c103.164,31.012) D6.2@103.042,30.718 ; 102.846,31.012 ccw(c103.164,31.012) D6.2@103.042,30.718 ; 102.846,31.012 D6.2@102.846,30.249 105.641,30.249 106.137,29.753 ; D6.2@103.333,29.89 cw(c104.2,29.023) 104.2,30.249 ; D6.2@103.333,29.89 cw(c104.2,29.023) 104.2,30.249 ; D6.2@103.333,29.89 cw(c104.2,29.023) 104.2,30.249 ; D6.2@103.333,29.89 cw(c104.2,29.023) 104.2,30.249 ; D6.2@103.333,30.608 ccw(c104.2,31.476) 104.2,30.249 ; D6.2@103.333,30.608 ccw(c104.2,31.476) 104.2,30.249 ; D6.2@103.333,30.608 ccw(c104.2,31.476) 104.2,30.249 ; D6.2@103.333,30.608 ccw(c104.2,31.476) 104.2,30.249 ; 104.614,30.249 cw(c104.614,29.557) v1@105.103,30.046 ; 104.614,30.249 cw(c104.614,29.557) v1@105.103,30.046 ; 104.614,30.249 cw(c104.614,29.557) v1@105.103,30.046 ; 104.614,30.249 cw(c104.614,29.557) v1@105.103,30.046 ; 104.726,30.249 ccw(c104.726,30.783) v1@105.103,30.406 ; 104.726,30.249 ccw(c104.726,30.783) v1@105.103,30.406 ; 104.726,30.249 ccw(c104.726,30.783) v1@105.103,30.406 ; 104.726,30.249 ccw(c104.726,30.783) v1@105.103,30.406 ; v1(105.283,30.226) ccw(c105.892,30.801) 105.868,29.963 ; v1(105.283,30.226) cw(c105.414,29.674) 105.815,30.075 ; v1(105.283,30.226) ccw(c105.892,30.801) 105.868,29.963 ; v1(105.283,30.226) ccw(c105.892,30.801) 105.868,29.963 ; v1(105.283,30.226) cw(c105.414,29.674) 105.815,30.075 ; v1(105.283,30.226) ccw(c105.892,30.801) 105.868,29.963 ; v1(105.283,30.226) ccw(c105.892,30.801) 105.868,29.963 ; v1(105.283,30.226) cw(c105.414,29.674) 105.815,30.075 ; v1(105.283,30.226) ccw(c105.892,30.801) 105.868,29.963 ; v1(105.283,30.226) cw(c105.414,29.674) 105.815,30.075 ; v1@105.341,29.979 cw(c105.537,29.153) 106.137,29.753 ; v1@105.341,29.979 cw(c105.537,29.153) 106.137,29.753 ; v1@105.341,29.979 cw(c105.537,29.153) 106.137,29.753 ; v1@105.341,29.979 cw(c105.537,29.153) 106.137,29.753 ; v1@105.406,30.004 cw(c105.524,29.791) 105.652,29.998 ; v1@105.406,30.004 cw(c105.524,29.791) 105.652,29.998 ; v1@105.406,30.004 cw(c105.524,29.791) 105.652,29.998 ; v1@105.406,30.004 cw(c105.524,29.791) 105.652,29.998 ; v1@105.537,30.215 ccw(c105.78,30.205) 105.652,29.998 ; v1@105.537,30.215 ccw(c105.78,30.205) 105.652,29.998 ; v1@105.537,30.215 ccw(c105.78,30.205) 105.652,29.998 ; v1@105.537,30.215 ccw(c105.78,30.205) 105.652,29.998 ; 106.137,29.753 cw(c106.137,29.428) D48.A@106.44,29.545 ; 106.137,29.753 ccw(c106.137,30.079) D48.A@106.44,29.961 ; 106.137,29.753 cw(c106.137,29.428) D48.A@106.44,29.545 ; 106.137,29.753 ccw(c106.137,30.079) D48.A@106.44,29.961 ; 106.137,29.753 cw(c106.137,29.428) D48.A@106.44,29.545 ; 106.137,29.753 ccw(c106.137,30.079) D48.A@106.44,29.961 ; 106.137,29.753 cw(c106.137,29.428) D48.A@106.44,29.545 ; 106.137,29.753 ccw(c106.137,30.079) D48.A@106.44,29.961
  Bottom Layer w0.254: v1(91.44,31.369) 91.567,31.242 v1(98.171,31.242) ; R5.2@103.124,29.083 105.283,29.083 ; v1(105.283,30.226) 105.283,29.083 ; C25.2@107.823,29.21 107.696,29.083 105.283,29.083 ; v1@91.62,31.549 ccw(c92.36,32.289) 92.36,31.242 ; v1@91.62,31.549 ccw(c92.36,32.289) 92.36,31.242 ; v1@91.62,31.549 ccw(c92.36,32.289) 92.36,31.242 ; v1@91.62,31.549 ccw(c92.36,32.289) 92.36,31.242 ; 97.558,31.242 cw(c97.558,30.629) v1@97.991,31.062 ; 97.558,31.242 ccw(c97.558,31.855) v1@97.991,31.422 ; 97.558,31.242 cw(c97.558,30.629) v1@97.991,31.062 ; 97.558,31.242 ccw(c97.558,31.855) v1@97.991,31.422 ; 97.558,31.242 cw(c97.558,30.629) v1@97.991,31.062 ; 97.558,31.242 ccw(c97.558,31.855) v1@97.991,31.422 ; 97.558,31.242 cw(c97.558,30.629) v1@97.991,31.062 ; 97.558,31.242 ccw(c97.558,31.855) v1@97.991,31.422 ; R5.2@103.61,28.724 cw(c104.477,27.857) 104.477,29.083 ; R5.2@103.61,28.724 cw(c104.477,27.857) 104.477,29.083 ; R5.2@103.61,28.724 cw(c104.477,27.857) 104.477,29.083 ; R5.2@103.61,28.724 cw(c104.477,27.857) 104.477,29.083 ; R5.2@103.61,29.442 ccw(c104.477,30.309) 104.477,29.083 ; R5.2@103.61,29.442 ccw(c104.477,30.309) 104.477,29.083 ; R5.2@103.61,29.442 ccw(c104.477,30.309) 104.477,29.083 ; R5.2@103.61,29.442 ccw(c104.477,30.309) 104.477,29.083 ; v1@105.103,30.046 cw(c104.67,29.613) 105.283,29.613 ; v1@105.103,30.046 cw(c104.67,29.613) 105.283,29.613 ; v1@105.103,30.046 cw(c104.67,29.613) 105.283,29.613 ; v1@105.103,30.046 cw(c104.67,29.613) 105.283,29.613 ; 105.283,29.613 cw(c105.896,29.613) v1@105.463,30.046 ; 105.283,29.613 cw(c105.896,29.613) v1@105.463,30.046 ; 105.283,29.613 cw(c105.896,29.613) v1@105.463,30.046 ; 105.283,29.613 cw(c105.896,29.613) v1@105.463,30.046 ; 106.163,29.083 ccw(c106.163,30.743) C25.2@107.337,29.569 ; 106.163,29.083 ccw(c106.163,30.743) C25.2@107.337,29.569 ; 106.163,29.083 ccw(c106.163,30.743) C25.2@107.337,29.569 ; 106.163,29.083 ccw(c106.163,30.743) C25.2@107.337,29.569 ; 106.776,29.083 cw(c106.776,28.29) C25.2@107.337,28.851 ; 106.776,29.083 ccw(c106.776,30.13) C25.2@107.516,29.39 ; 106.776,29.083 cw(c106.776,28.29) C25.2@107.337,28.851 ; 106.776,29.083 ccw(c106.776,30.13) C25.2@107.516,29.39 ; 106.776,29.083 cw(c106.776,28.29) C25.2@107.337,28.851 ; 106.776,29.083 ccw(c106.776,30.13) C25.2@107.516,29.39 ; 106.776,29.083 cw(c106.776,28.29) C25.2@107.337,28.851 ; 106.776,29.083 ccw(c106.776,30.13) C25.2@107.516,29.39
IN6: C27.2 D7.2 D49.A R6.2 U5.92 | length 139.8
  Top Layer w0.254: U5.92@69.272,67.151 74.581,67.151 75.565,66.167 75.565,40.767 76.073,40.259 102.108,40.259 102.719,39.648 D7.2@102.719,33.424 104.371,33.424 v1(105.283,32.512) ; D49.A@106.974,31.912 105.883,31.912 ; D7.2@102.36,33.783 ccw(c101.493,34.651) 102.719,34.651 ; D7.2@102.36,33.783 ccw(c101.493,34.651) 102.719,34.651 ; D7.2@102.36,33.783 ccw(c101.493,34.651) 102.719,34.651 ; D7.2@102.36,33.783 ccw(c101.493,34.651) 102.719,34.651 ; 102.719,34.651 ccw(c103.946,34.651) D7.2@103.079,33.783 ; 102.719,34.651 ccw(c103.946,34.651) D7.2@103.079,33.783 ; 102.719,34.651 ccw(c103.946,34.651) D7.2@103.079,33.783 ; 102.719,34.651 ccw(c103.946,34.651) D7.2@103.079,33.783 ; D7.2@103.206,33.065 cw(c104.073,32.198) 104.073,33.424 ; D7.2@103.206,33.065 cw(c104.073,32.198) 104.073,33.424 ; D7.2@103.206,33.065 cw(c104.073,32.198) 104.073,33.424 ; D7.2@103.206,33.065 cw(c104.073,32.198) 104.073,33.424 ; D7.2@103.206,33.783 ccw(c104.073,34.651) 104.073,33.424 ; D7.2@103.206,33.783 ccw(c104.073,34.651) 104.073,33.424 ; D7.2@103.206,33.783 ccw(c104.073,34.651) 104.073,33.424 ; D7.2@103.206,33.783 ccw(c104.073,34.651) 104.073,33.424 ; 104.849,32.946 cw(c104.416,32.512) v1@105.029,32.512 ; 104.849,32.946 ccw(c105.283,33.379) v1@105.283,32.766 ; 104.849,32.946 cw(c104.416,32.512) v1@105.029,32.512 ; 104.849,32.946 ccw(c105.283,33.379) v1@105.283,32.766 ; 104.849,32.946 cw(c104.416,32.512) v1@105.029,32.512 ; 104.849,32.946 ccw(c105.283,33.379) v1@105.283,32.766 ; 104.849,32.946 cw(c104.416,32.512) v1@105.029,32.512 ; 104.849,32.946 ccw(c105.283,33.379) v1@105.283,32.766 ; 104.943,32.832 ccw(c105.372,32.947) v1(105.283,32.512) ; 104.943,32.832 ccw(c105.372,32.947) v1(105.283,32.512) ; 104.943,32.832 ccw(c105.372,32.947) v1(105.283,32.512) ; 104.943,32.832 ccw(c105.372,32.947) v1(105.283,32.512) ; 104.943,32.832 ccw(c105.372,32.947) v1(105.283,32.512) ; 104.943,32.832 ccw(c105.372,32.947) v1(105.283,32.512) ; 104.963,32.852 cw(c104.848,32.423) v1(105.283,32.512) ; 104.963,32.852 cw(c104.848,32.423) v1(105.283,32.512) ; 104.963,32.852 cw(c104.848,32.423) v1(105.283,32.512) ; 104.963,32.852 cw(c104.848,32.423) v1(105.283,32.512) ; 104.963,32.852 cw(c104.848,32.423) v1(105.283,32.512) ; 104.963,32.852 cw(c104.848,32.423) v1(105.283,32.512) ; v1@105.283,32.258 cw(c105.283,31.645) 105.717,32.078 ; v1@105.283,32.258 cw(c105.283,31.645) 105.717,32.078 ; v1@105.283,32.258 cw(c105.283,31.645) 105.717,32.078 ; v1@105.283,32.258 cw(c105.283,31.645) 105.717,32.078 ; v1(105.283,32.512) cw(c105.194,32.077) 105.623,32.192 ; v1(105.283,32.512) ccw(c105.718,32.601) 105.603,32.172 ; v1(105.283,32.512) cw(c105.194,32.077) 105.623,32.192 ; v1(105.283,32.512) ccw(c105.718,32.601) 105.603,32.172 ; v1(105.283,32.512) cw(c105.194,32.077) 105.623,32.192 ; v1(105.283,32.512) ccw(c105.718,32.601) 105.603,32.172 ; v1(105.283,32.512) cw(c105.194,32.077) 105.623,32.192 ; v1(105.283,32.512) ccw(c105.718,32.601) 105.603,32.172 ; v1(105.283,32.512) cw(c105.194,32.077) 105.623,32.192 ; v1(105.283,32.512) ccw(c105.718,32.601) 105.603,32.172 ; v1(105.283,32.512) cw(c105.194,32.077) 105.623,32.192 ; v1(105.283,32.512) ccw(c105.718,32.601) 105.603,32.172 ; v1(105.283,32.512) 105.883,31.912 ; v1@105.537,32.512 ccw(c106.15,32.512) 105.717,32.078 ; v1@105.537,32.512 ccw(c106.15,32.512) 105.717,32.078 ; v1@105.537,32.512 ccw(c106.15,32.512) 105.717,32.078 ; v1@105.537,32.512 ccw(c106.15,32.512) 105.717,32.078 ; 105.883,31.912 cw(c105.883,31.159) D49.A@106.503,31.587 ; 105.883,31.912 ccw(c105.883,32.665) D49.A@106.503,32.237 ; 105.883,31.912 cw(c105.883,31.159) D49.A@106.503,31.587 ; 105.883,31.912 ccw(c105.883,32.665) D49.A@106.503,32.237 ; 105.883,31.912 cw(c105.883,31.159) D49.A@106.503,31.587 ; 105.883,31.912 ccw(c105.883,32.665) D49.A@106.503,32.237 ; 105.883,31.912 cw(c105.883,31.159) D49.A@106.503,31.587 ; 105.883,31.912 ccw(c105.883,32.665) D49.A@106.503,32.237
  Bottom Layer w0.254: R6.2@103.124,31.623 105.283,31.623 ; v1(105.283,32.512) 105.283,31.623 ; C27.2@107.823,31.75 107.696,31.623 105.283,31.623 ; R6.2@103.61,31.264 cw(c104.477,30.397) 104.477,31.623 ; R6.2@103.61,31.264 cw(c104.477,30.397) 104.477,31.623 ; R6.2@103.61,31.264 cw(c104.477,30.397) 104.477,31.623 ; R6.2@103.61,31.264 cw(c104.477,30.397) 104.477,31.623 ; R6.2@103.61,31.982 ccw(c104.477,32.849) 104.477,31.623 ; R6.2@103.61,31.982 ccw(c104.477,32.849) 104.477,31.623 ; R6.2@103.61,31.982 ccw(c104.477,32.849) 104.477,31.623 ; R6.2@103.61,31.982 ccw(c104.477,32.849) 104.477,31.623 ; v1@105.103,32.332 cw(c104.67,31.899) 105.283,31.899 ; v1@105.103,32.332 cw(c104.67,31.899) 105.283,31.899 ; v1@105.103,32.332 cw(c104.67,31.899) 105.283,31.899 ; v1@105.103,32.332 cw(c104.67,31.899) 105.283,31.899 ; 105.283,31.899 cw(c105.896,31.899) v1@105.463,32.332 ; 105.283,31.899 cw(c105.896,31.899) v1@105.463,32.332 ; 105.283,31.899 cw(c105.896,31.899) v1@105.463,32.332 ; 105.283,31.899 cw(c105.896,31.899) v1@105.463,32.332 ; 106.163,31.623 ccw(c106.163,33.283) C27.2@107.337,32.109 ; 106.163,31.623 ccw(c106.163,33.283) C27.2@107.337,32.109 ; 106.163,31.623 ccw(c106.163,33.283) C27.2@107.337,32.109 ; 106.163,31.623 ccw(c106.163,33.283) C27.2@107.337,32.109 ; 106.776,31.623 cw(c106.776,30.83) C27.2@107.337,31.391 ; 106.776,31.623 ccw(c106.776,32.67) C27.2@107.516,31.93 ; 106.776,31.623 cw(c106.776,30.83) C27.2@107.337,31.391 ; 106.776,31.623 ccw(c106.776,32.67) C27.2@107.516,31.93 ; 106.776,31.623 cw(c106.776,30.83) C27.2@107.337,31.391 ; 106.776,31.623 ccw(c106.776,32.67) C27.2@107.516,31.93 ; 106.776,31.623 cw(c106.776,30.83) C27.2@107.337,31.391 ; 106.776,31.623 ccw(c106.776,32.67) C27.2@107.516,31.93
KEY1: C68.1 K1.2 R8.2 U5.45 | length 35.6
  Top Layer w0.254: K1.2@51.123,47.879 51.123,53.017 50.292,53.848 50.292,60.809 51.134,61.651 U5.45@54.172,61.651 ; K1.2@50.831,47.66 ccw(c50.125,48.366) 51.123,48.366 ; K1.2@50.831,47.66 ccw(c50.125,48.366) 51.123,48.366 ; K1.2@50.831,47.66 ccw(c50.125,48.366) 51.123,48.366 ; 51.123,48.366 ccw(c52.375,48.366) K1.2@51.49,47.481 ; 51.123,48.366 ccw(c52.375,48.366) K1.2@51.49,47.481 ; 51.123,48.366 ccw(c52.375,48.366) K1.2@51.49,47.481 ; 51.123,48.979 ccw(c52.988,48.979) K1.2@51.669,47.66 ; 51.123,48.979 ccw(c52.988,48.979) K1.2@51.669,47.66 ; 51.123,48.979 ccw(c52.988,48.979) K1.2@51.669,47.66 ; v1@51.001,51.509 cw(c50.708,51.216) 51.123,51.216 ccw(c50.708,51.216) v1@51.001,51.509 ; v1@51.001,51.869 ccw(c50.708,52.162) 51.123,52.162 cw(c50.708,52.162) v1@51.001,51.869 ; 51.123,50.936 cw(c51.934,50.936) 51.361,51.509 ccw(c51.934,50.936) 51.123,50.936 ; 51.123,52.442 ccw(c51.934,52.442) 51.361,51.869 cw(c51.934,52.442) 51.123,52.442
  Bottom Layer w0.254: 50.038,49.911 50.165,50.038
  Bottom Layer w0.762: R8.2@48.768,49.911 50.038,49.911 C68.1@51.308,49.911 51.308,51.562 v1(51.181,51.689)